# Altium PCB 07电位器.PcbDoc
Units mil, origin at the board's own origin, x right, y up, seen from the top; angles counter-clockwise.
Board outline 1168.96 x 939.58 mil, 2 copper layers (Top Layer, Bottom Layer); 1 components, 7 nets, 10 pads, 18 vias.
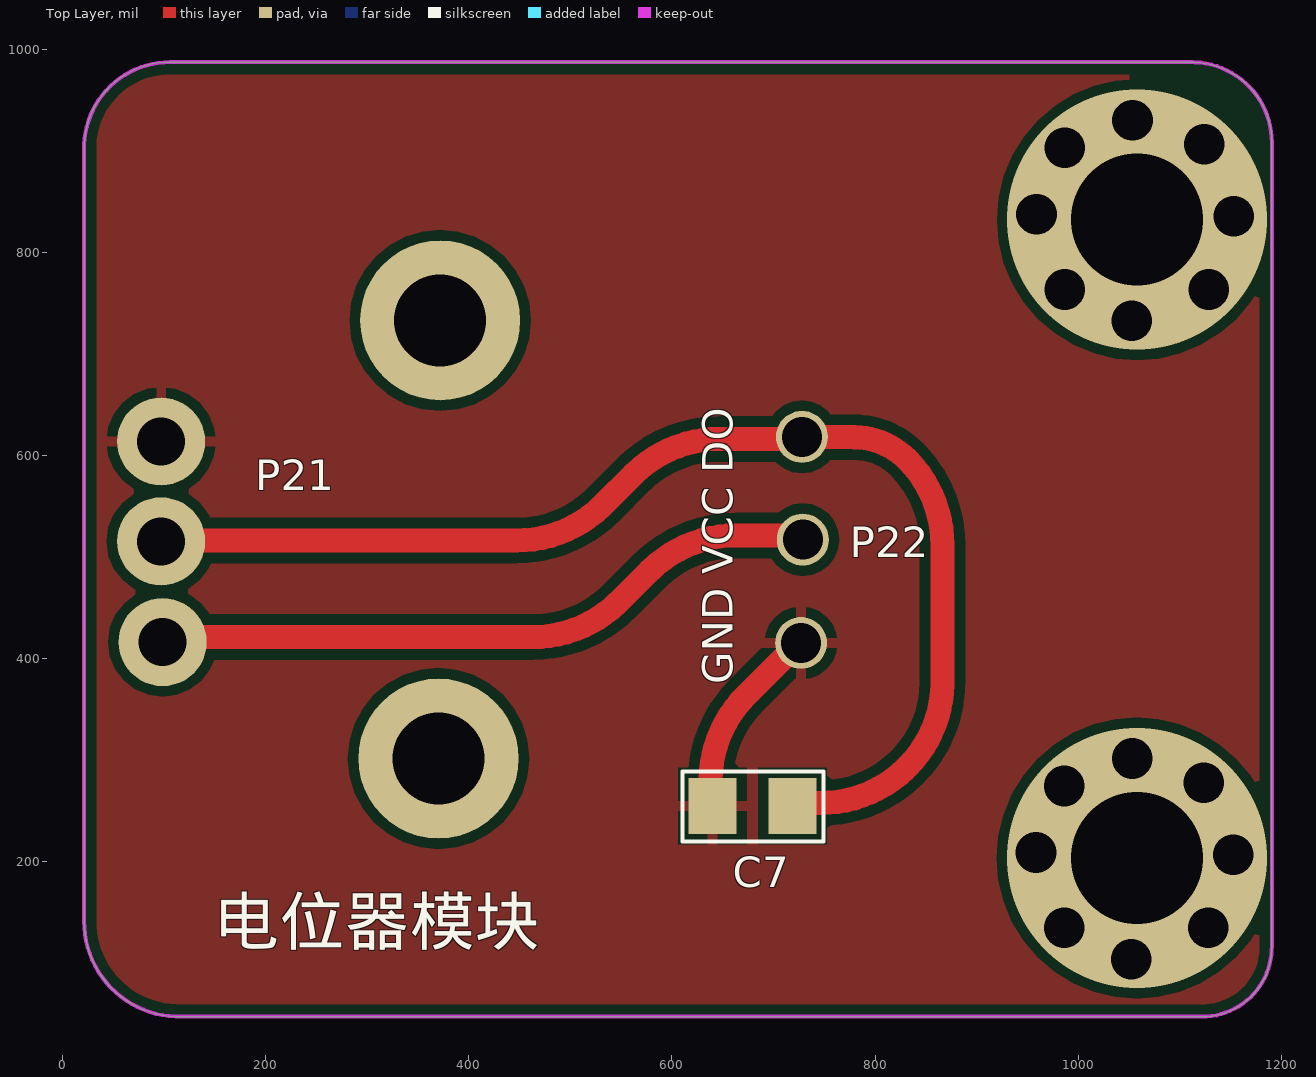
[diagram p0: Top Layer view]
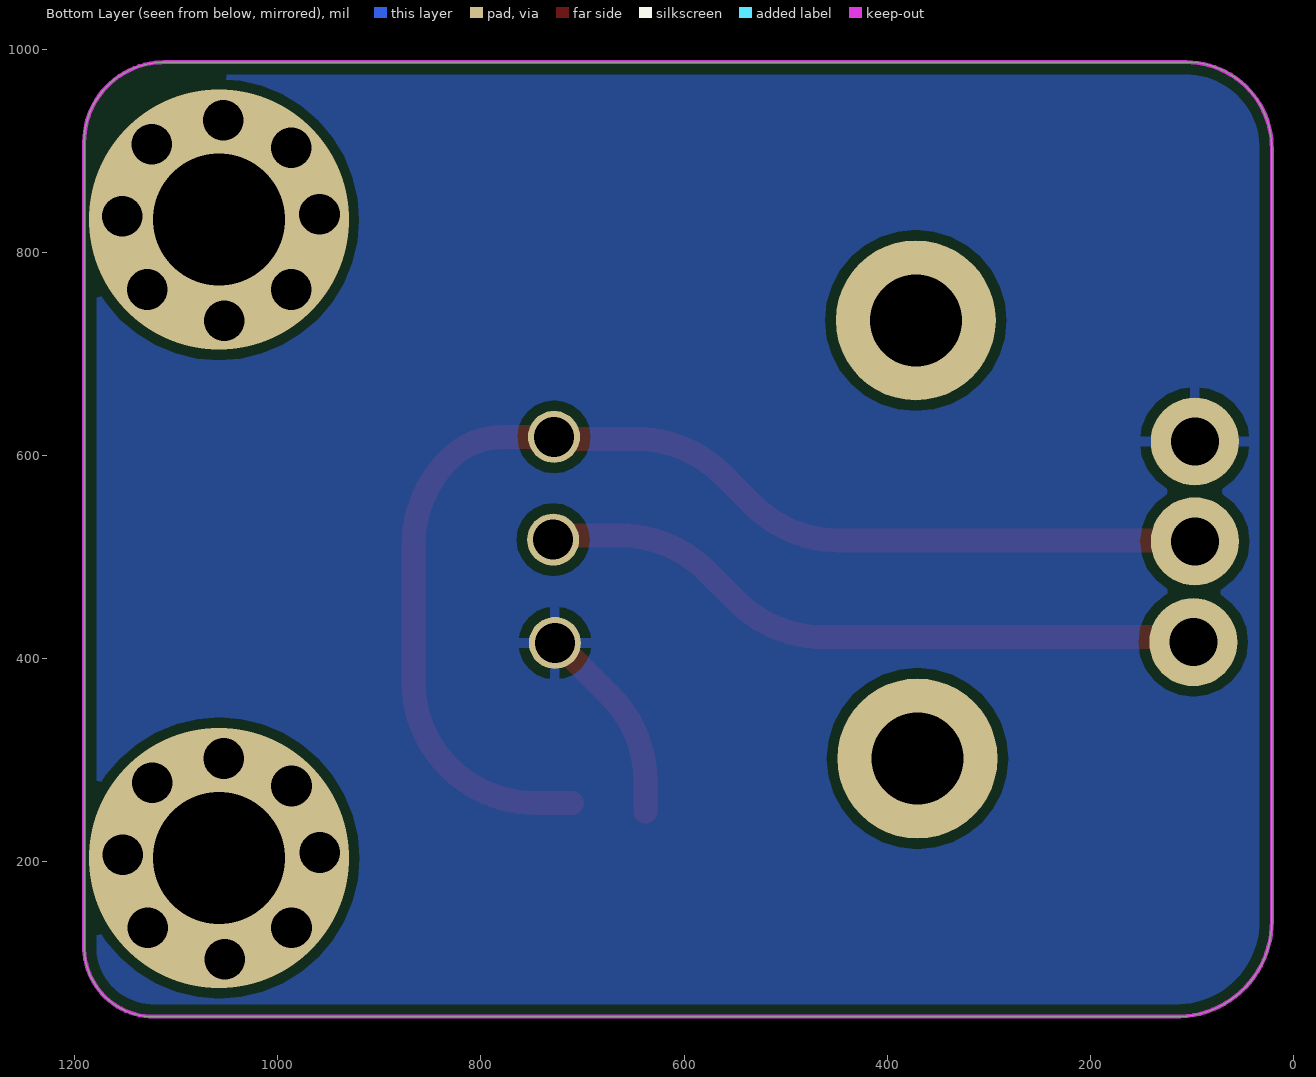
[diagram p1: Bottom Layer view, seen from below]

## Layer stack, top to bottom
Top Solder: solder mask 0.4, Solder Resist, Dk 3.5
Top Layer: signal copper 1.4
Dielectric1: dielectric 12.6, FR-4, Dk 4.8
Bottom Layer: signal copper 1.4
Bottom Solder: solder mask 0.4, Solder Resist, Dk 3.5

## Board outline
35.57,92 32.32,97.68 29.46,103.57 27.03,109.65 25.03,115.89 23.47,122.25 22.35,128.7 21.69,135.21 21.48,141.76 21.48,903.15 21.54,906.09 21.97,911.96 22.81,917.79 24.05,923.55 25.69,929.2 27.73,934.72 30.14,940.09 32.92,945.28 36.06,950.26 39.53,955.02 43.33,959.51 47.43,963.73 51.82,967.66 56.47,971.27 61.36,974.54 66.47,977.47 71.77,980.03 77.24,982.22 82.84,984.02 88.56,985.43 94.36,986.43 100.22,987.02 106.1,987.21 105.82,987.17 1111.68,987.17 1111.94,987.1 1114.69,987.04 1120.17,986.64 1125.61,985.86 1130.99,984.7 1136.27,983.16 1141.42,981.27 1146.44,979.01 1151.29,976.42 1155.94,973.49 1160.37,970.24 1164.57,966.7 1168.52,962.86 1172.18,958.77 1175.55,954.42 1178.61,949.86 1181.34,945.09 1183.74,940.14 1185.78,935.03 1187.46,929.8 1188.77,924.46 1189.71,919.04 1190.27,913.57 1190.44,908.08 1190.44,115.99 1190.38,113.6 1190.03,108.82 1189.35,104.08 1188.34,99.4 1187,94.81 1185.35,90.31 1183.39,85.95 1181.13,81.73 1178.58,77.67 1175.75,73.81 1172.66,70.15 1169.32,66.72 1165.75,63.53 1161.97,60.59 1157.99,57.93 1153.84,55.55 1149.53,53.47 1145.08,51.69 1140.52,50.22 1135.88,49.08 1131.16,48.27 1126.4,47.78 1121.61,47.63 114.98,47.63 111.72,47.7 105.18,48.18 98.7,49.11 92.3,50.49 86.01,52.32 79.87,54.58 73.89,57.26 68.12,60.35 62.58,63.84 57.29,67.71 52.29,71.94 47.6,76.5 43.23,81.38 39.22,86.55

## Design rules (kind name [scope] priority, off if disabled: settings)
Clearance CAM_Clearance_2 [OnLayer('Top Layer')] p1: gap=10 ignorepadtopadclearanceinfootprint=FALSE except(0: Arc-Hole Track-Hole SMDPad-Hole THPad-Hole Via-Hole Fill-Hole Poly-Hole Region-Hole Text-Hole)
Clearance CAM_Clearance_1 [OnLayer('Bottom Layer')] p2: gap=10 ignorepadtopadclearanceinfootprint=FALSE except(0: Arc-Hole Track-Hole SMDPad-Hole THPad-Hole Via-Hole Fill-Hole Poly-Hole Region-Hole Text-Hole)
Clearance [All] p3: gap=10 ignorepadtopadclearanceinfootprint=FALSE except(0: Arc-Hole Track-Hole SMDPad-Hole THPad-Hole Via-Hole Fill-Hole Poly-Hole Region-Hole Text-Hole)
PolygonConnect [All] p1: connectstyle=Relief reliefconductorwidth=10 reliefentries=4 polygonreliefangle="90 Angle" airgapwidth=10
RoutingVias [All] p1: holewidth=28 width=50 viastyle="Through Hole" minholewidth=28 minwidth=50 maxholewidth=28 maxwidth=50
SilkToSolderMaskClearance SilkscreenOverComponentPads [IsPad] p1: minsilkscreentomaskgap=10 clearancetoexposedcopper=TRUE
SolderMaskExpansion [All] p1: expansion=4
Width CAM_Width_2 [OnLayer('Top Layer')] p1: maxlimit=24.62 minlimit=22.62 preferedwidth=23.62
Width CAM_Width_1 [OnLayer('Bottom Layer')] p2: maxlimit=11 minlimit=4 preferedwidth=5
Width [All] p3: maxlimit=10 minlimit=10 preferedwidth=10
29 further rules are at their usual default settings.

## Components (designator, comment, footprint, x,y, rotation, side; value= is the part's Value field where it differs from the comment)
C7 "104 50V  10%" 0805-R 679.25,255 r180 top

## Footprints (in the part's own frame and the unit in brackets; to place one, negate y for a bottom-side part, rotate by r counter-clockwise, add the part's x,y. Pads: shape width x height; smd on the part's side, far side on the other; paste and mask are expansions set on the pad)
0805-R [mm]
  rect 1.2x1.4 smd: 1(-1,0) 2(1,0)
  silkscreen extent -1.78,-0.86 1.75,0.89, body extent -0.97,-0.61 1.03,0.64, height 0.55

## Free pads (board coordinates)
  round 86.61 hole 47.24: 7(97.3,515.52) 7(97.31,613.86) 7(98.78,416.35)
  round 157.48 hole 90.55: 8(370.24,301.77) 8(371.9,733.02)
  round 51.18 hole 39.37: 9(727.12,415.53) 9(727.95,618.44) 9(728.78,517.18)

## Via types
v1: diameter 40, hole 40, Top Layer to Bottom Layer, 16 vias
v2: diameter 255.91, hole 129.92, Top Layer to Bottom Layer, 2 vias

## Nets (pads, with @x,y where several pads share a name; then routed paths per layer and width w, separated by ;. In a path a pad name is that pad's centre, name@x,y a point inside that pad or via, vN(x,y) a via of type N, cw(c..) or ccw(c..) an arc to the next point about the centre after c; other vN are vias at no path point)
$Net0: C7.2 pad.7@97.31,613.86 pad.9@727.12,415.53 | length 197.9
  Top Layer w23.62: C7.2@637.94,249.7 637.94,278.84 637.96,280.96 638.4,289.37 639.42,297.73 641.03,306 643.21,314.14 645.95,322.11 649.25,329.86 653.07,337.37 657.41,344.59 662.24,351.49 667.54,358.04 673.29,364.2 719.99,410.9 720.47,411.41 720.91,411.96 721.31,412.53 721.67,413.14 721.99,413.76 722.27,414.41 722.5,415.07 722.68,415.75 722.81,416.44 722.9,417.13 722.93,417.83 pad.9@722.94,418.01
$Net1: pad.7@98.78,416.35 pad.9@728.78,517.18 | length 685.2
  Top Layer w23.62: pad.7@72.94,421.34 462.94,421.34 471.36,421.63 479.74,422.51 488.04,423.98 496.21,426.02 504.23,428.62 512.04,431.78 519.61,435.47 526.91,439.68 533.89,444.39 540.53,449.58 546.79,455.22 548.29,456.7 577.59,486 579.09,487.47 585.35,493.11 591.99,498.3 598.97,503.01 606.27,507.22 613.84,510.91 621.65,514.07 629.67,516.67 637.84,518.71 646.14,520.18 654.52,521.06 662.94,521.35 pad.9@727.11,521.35
$Net2: C7.1 pad.7@97.3,515.52 pad.9@727.95,618.44 | length 1244.8
  Top Layer w23.62: pad.7@87.11,516.35 447.11,516.35 455.53,516.64 463.91,517.52 472.21,518.99 480.38,521.03 488.4,523.63 496.21,526.79 503.78,530.48 511.08,534.69 518.06,539.4 524.7,544.59 530.96,550.23 532.47,551.71 561.76,581 563.26,582.47 569.52,588.11 576.16,593.3 583.14,598.01 590.44,602.22 598.01,605.91 605.82,609.07 613.84,611.67 622.01,613.71 630.31,615.18 638.69,616.06 647.11,616.35 pad.9@731.28,616.35 ; C7.1@710.44,258.01 746.27,258.01 754.69,258.3 763.07,259.18 771.37,260.65 779.54,262.69 787.56,265.29 795.37,268.45 802.94,272.14 810.24,276.35 817.22,281.06 823.86,286.25 830.12,291.89 831.62,293.37 837.25,299.41 842.45,305.83 847.19,312.59 851.44,319.67 855.19,327.03 858.41,334.63 861.1,342.44 863.24,350.42 864.82,358.52 865.82,366.72 866.25,374.97 866.28,377.03 866.28,511.85 865.99,520.19 865.12,528.48 863.67,536.7 861.65,544.79 859.07,552.72 855.95,560.46 852.29,567.95 848.12,575.18 843.46,582.09 838.32,588.66 832.74,594.86 831.28,596.35 827.5,599.87 823.49,603.12 819.27,606.08 814.84,608.74 810.24,611.08 805.49,613.1 800.61,614.78 795.62,616.11 790.56,617.1 785.43,617.73 780.28,618 778.99,618.01 pad.9@719.6,618.01
$Net3: 
  other v1: 1052.12,104.29 986.28,135.11 1127.94,135.11 1152.53,207.21 958.37,209.29 986.28,274.71 1123.37,278.04 1052.94,301.8
  other v2: 1057.53,203.87
$Net4: 
  other v1: 1052.53,732.6 986.68,763.42 1128.35,763.43 1152.94,835.52 958.78,837.6 986.69,903.02 1123.78,906.35 1053.35,930.11
  other v2: 1057.93,832.18
$Net5: pad.8@370.24,301.77
$Net6: pad.8@371.9,733.02

## Polygon pours and split planes (outlines as drawn)
$Net0 on Top Layer "Top Layer-No Net" (solid, pour order 1002): 35.57,92 32.32,97.68 29.46,103.57 27.03,109.65 25.03,115.89 23.47,122.25 22.35,128.7 21.69,135.21 21.48,141.76 21.48,903.15 21.54,906.09 21.97,911.96 22.81,917.79 24.05,923.55 25.69,929.2 27.73,934.72 30.14,940.09 32.92,945.28 36.06,950.26 39.53,955.02 43.33,959.51 47.43,963.73 51.82,967.66 56.47,971.27 61.36,974.54 66.47,977.47 71.77,980.03 77.24,982.22 82.84,984.02 88.56,985.43 94.36,986.43 100.22,987.02 106.1,987.21 105.82,987.17 1111.68,987.17 1111.94,987.1 1114.69,987.04 1120.17,986.64 1125.61,985.86 1130.99,984.7 1136.27,983.16 1141.42,981.27 1146.44,979.01 1151.29,976.42 1155.94,973.49 1160.37,970.24 1164.57,966.7 1168.52,962.86 1172.18,958.77 1175.55,954.42 1178.61,949.86 1181.34,945.09 1183.74,940.14 1185.78,935.03 1187.46,929.8 1188.77,924.46 1189.71,919.04 1190.27,913.57 1190.44,908.08 1190.44,115.99 1190.38,113.6 1190.03,108.82 1189.35,104.08 1188.34,99.4 1187,94.81 1185.35,90.31 1183.39,85.95 1181.13,81.73 1178.58,77.67 1175.75,73.81 1172.66,70.15 1169.32,66.72 1165.75,63.53 1161.97,60.59 1157.99,57.93 1153.84,55.55 1149.53,53.47 1145.08,51.69 1140.52,50.22 1135.88,49.08 1131.16,48.27 1126.4,47.78 1121.61,47.63 114.98,47.63 111.72,47.7 105.18,48.18 98.7,49.11 92.3,50.49 86.01,52.32 79.87,54.58 73.89,57.26 68.12,60.35 62.58,63.84 57.29,67.71 52.29,71.94 47.6,76.5 43.23,81.38 39.22,86.55
$Net0 on Bottom Layer "Top Layer-No Net1" (solid, pour order 1003): 35.57,92 32.32,97.68 29.46,103.57 27.03,109.65 25.03,115.89 23.47,122.25 22.35,128.7 21.69,135.21 21.48,141.76 21.48,903.15 21.54,906.09 21.97,911.96 22.81,917.79 24.05,923.55 25.69,929.2 27.73,934.72 30.14,940.09 32.92,945.28 36.06,950.26 39.53,955.02 43.33,959.51 47.43,963.73 51.82,967.66 56.47,971.27 61.36,974.54 66.47,977.47 71.77,980.03 77.24,982.22 82.84,984.02 88.56,985.43 94.36,986.43 100.22,987.02 106.1,987.21 105.82,987.17 1111.68,987.17 1111.94,987.1 1114.69,987.04 1120.17,986.64 1125.61,985.86 1130.99,984.7 1136.27,983.16 1141.42,981.27 1146.44,979.01 1151.29,976.42 1155.94,973.49 1160.37,970.24 1164.57,966.7 1168.52,962.86 1172.18,958.77 1175.55,954.42 1178.61,949.86 1181.34,945.09 1183.74,940.14 1185.78,935.03 1187.46,929.8 1188.77,924.46 1189.71,919.04 1190.27,913.57 1190.44,908.08 1190.44,115.99 1190.38,113.6 1190.03,108.82 1189.35,104.08 1188.34,99.4 1187,94.81 1185.35,90.31 1183.39,85.95 1181.13,81.73 1178.58,77.67 1175.75,73.81 1172.66,70.15 1169.32,66.72 1165.75,63.53 1161.97,60.59 1157.99,57.93 1153.84,55.55 1149.53,53.47 1145.08,51.69 1140.52,50.22 1135.88,49.08 1131.16,48.27 1126.4,47.78 1121.61,47.63 114.98,47.63 111.72,47.7 105.18,48.18 98.7,49.11 92.3,50.49 86.01,52.32 79.87,54.58 73.89,57.26 68.12,60.35 62.58,63.84 57.29,67.71 52.29,71.94 47.6,76.5 43.23,81.38 39.22,86.55

## Keep-outs
Keep-Out Layer:
  lines w3.94: 21.48,141.45 21.48,902.86 ; 21.48,141.76 21.69,135.21 22.35,128.7 23.47,122.25 25.03,115.89 27.03,109.65 29.46,103.57 32.32,97.68 35.57,92 39.22,86.55 43.23,81.38 47.6,76.5 52.29,71.94 57.29,67.71 62.58,63.84 68.12,60.35 73.89,57.26 79.87,54.58 86.01,52.32 92.3,50.49 98.7,49.11 105.18,48.18 111.72,47.7 114.98,47.63 ; 21.48,903.15 21.54,906.09 21.97,911.96 22.81,917.79 24.05,923.55 25.69,929.2 27.73,934.72 30.14,940.09 32.92,945.28 36.06,950.26 39.53,955.02 43.33,959.51 47.43,963.73 51.82,967.66 56.47,971.27 61.36,974.54 66.47,977.47 71.77,980.03 77.24,982.22 82.84,984.02 88.56,985.43 94.36,986.43 100.22,987.02 106.1,987.21 ; 105.82,987.17 1111.68,987.17 ; 115.3,47.63 1121.84,47.63 ; 1111.94,987.1 1114.69,987.04 1120.17,986.64 1125.61,985.86 1130.99,984.7 1136.27,983.16 1141.42,981.27 1146.44,979.01 1151.29,976.42 1155.94,973.49 1160.37,970.24 1164.57,966.7 1168.52,962.86 1172.18,958.77 1175.55,954.42 1178.61,949.86 1181.34,945.09 1183.74,940.14 1185.78,935.03 1187.46,929.8 1188.77,924.46 1189.71,919.04 1190.27,913.57 1190.44,908.08 ; 1121.61,47.63 1126.4,47.78 1131.16,48.27 1135.88,49.08 1140.52,50.22 1145.08,51.69 1149.53,53.47 1153.84,55.55 1157.99,57.93 1161.97,60.59 1165.75,63.53 1169.32,66.72 1172.66,70.15 1175.75,73.81 1178.58,77.67 1181.13,81.73 1183.39,85.95 1185.35,90.31 1187,94.81 1188.34,99.4 1189.35,104.08 1190.03,108.82 1190.38,113.6 1190.44,115.99 ; 1190.44,116.22 1190.44,908.34

## Silkscreen, mask and mechanical layers (free items; w line width, h text height)
Top Overlay:
  text "P21" at 190,565.98 h30
  text "P22" at 775,500 h30
  text "GND VCC DO" at 660,375 h30 r90
  text "电位器模块" at 150,103.57 h80